# Altium PCB DRV8462.PcbDoc
Units mil, origin at the board's own origin, x right, y up, seen from the top; angles counter-clockwise.
Board outline 2200.64 x 1706.62 mil, 4 copper layers (Top Layer, GND, 3V3, Bottom Layer), stack 23.756 mil thick; 34 components, 27 nets, 125 pads, 186 vias.
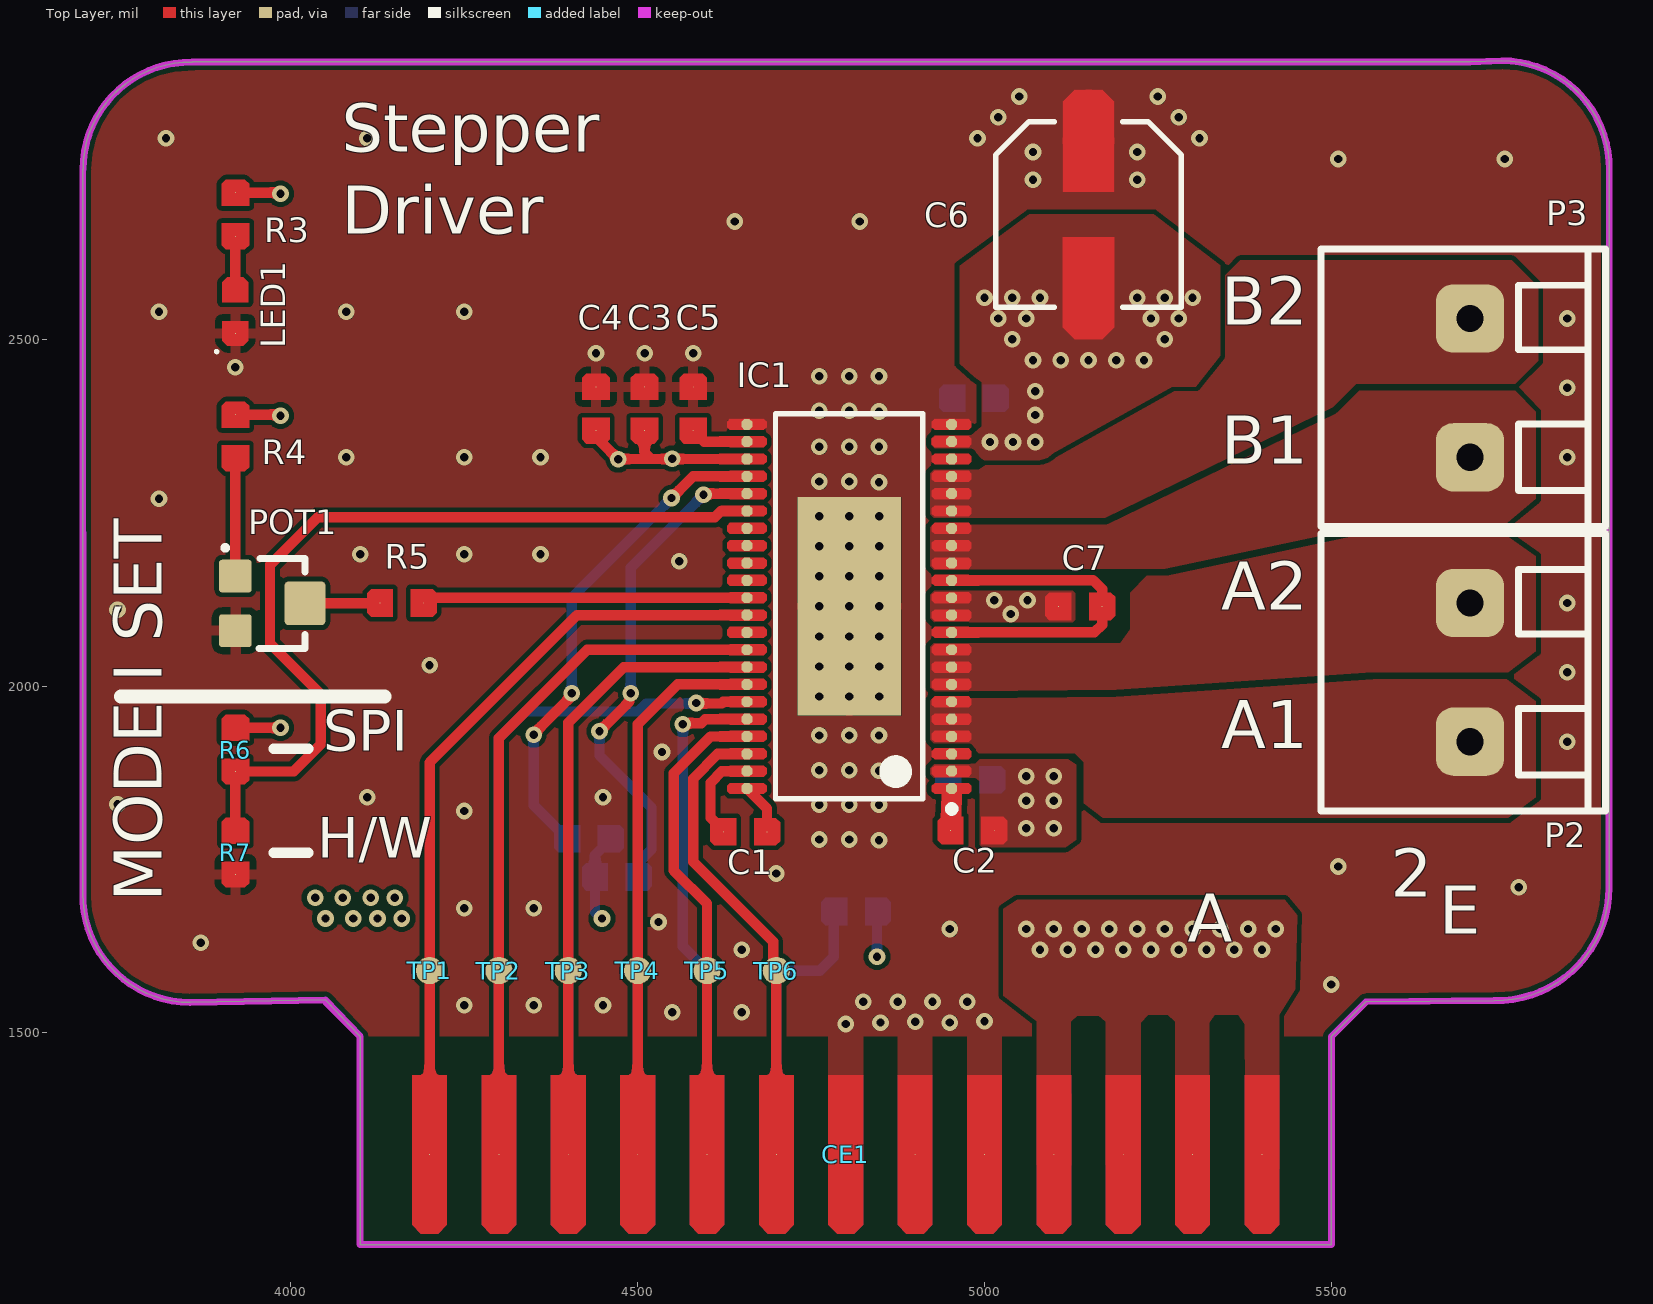
[diagram p0: Top Layer view]
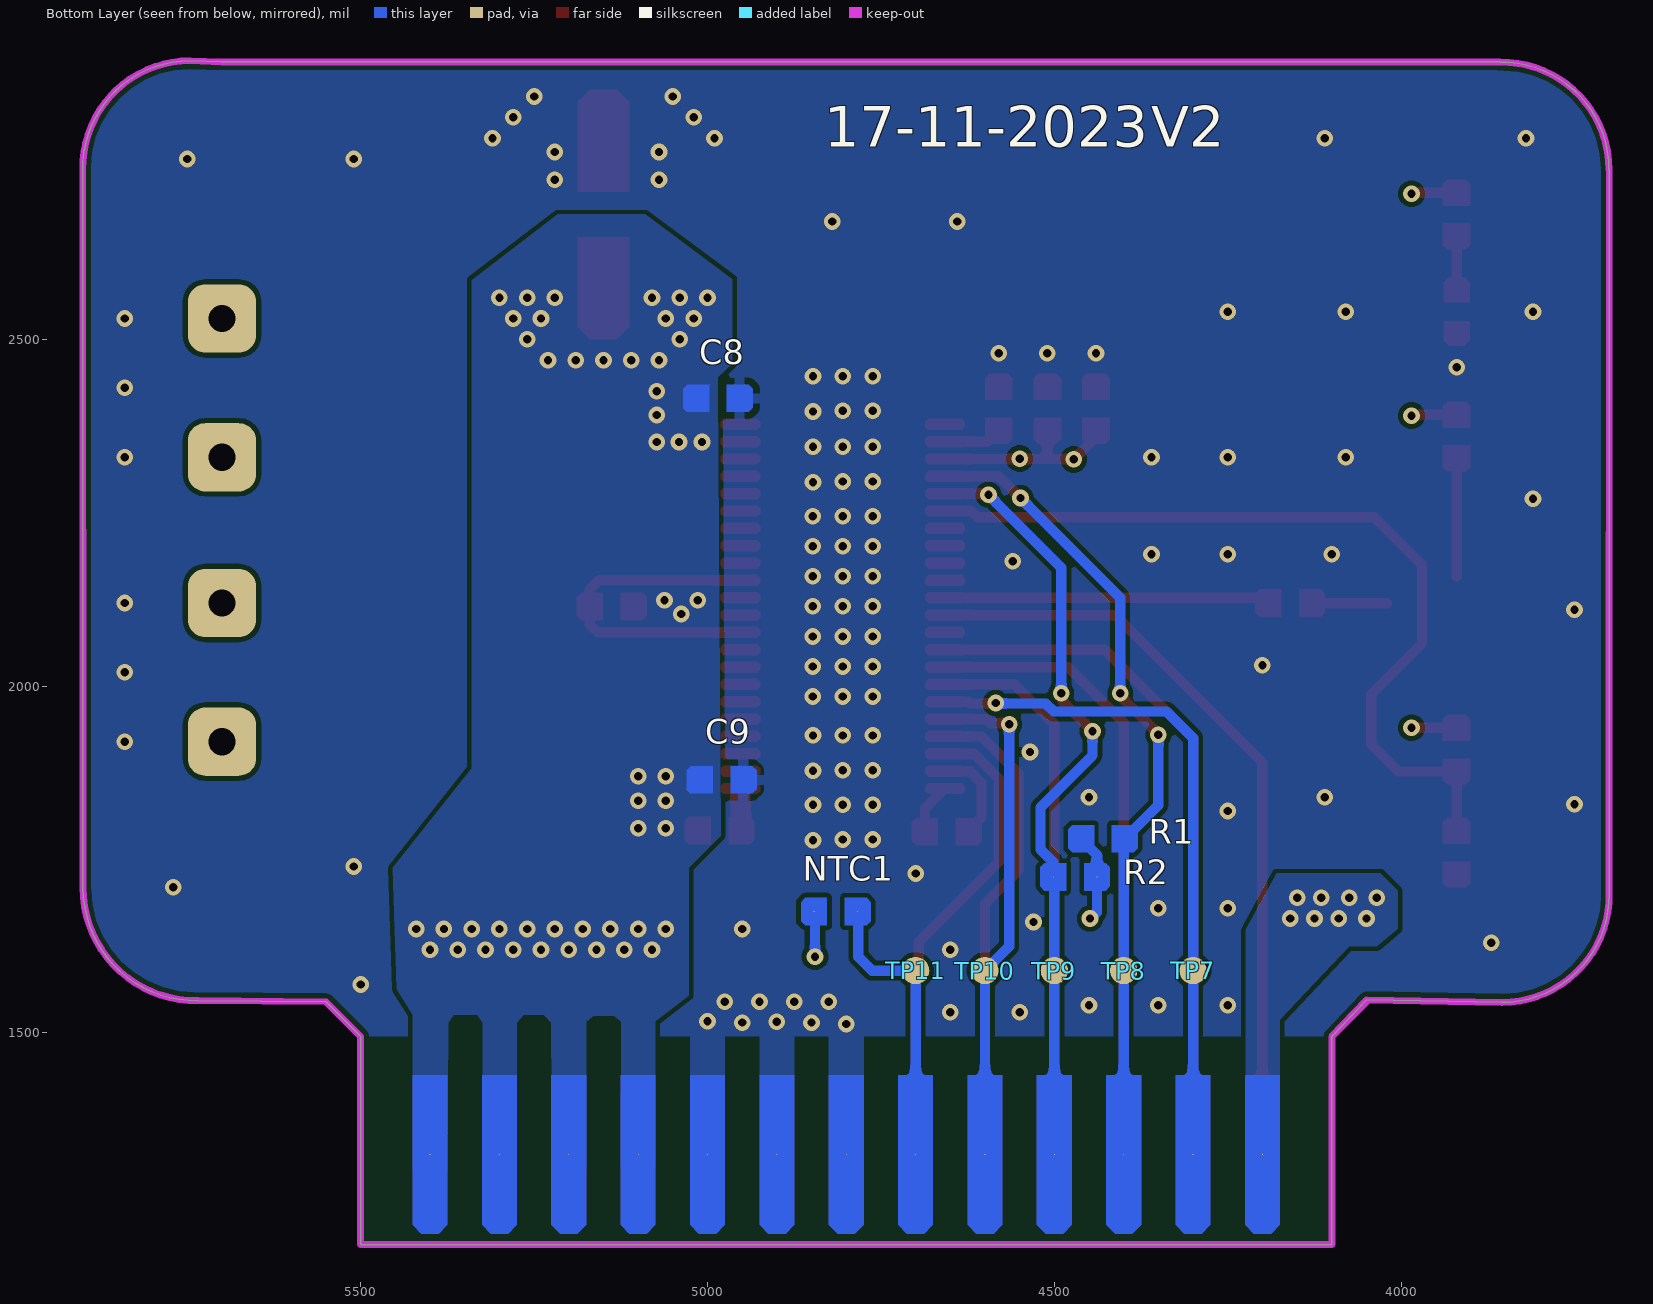
[diagram p1: Bottom Layer view, seen from below]
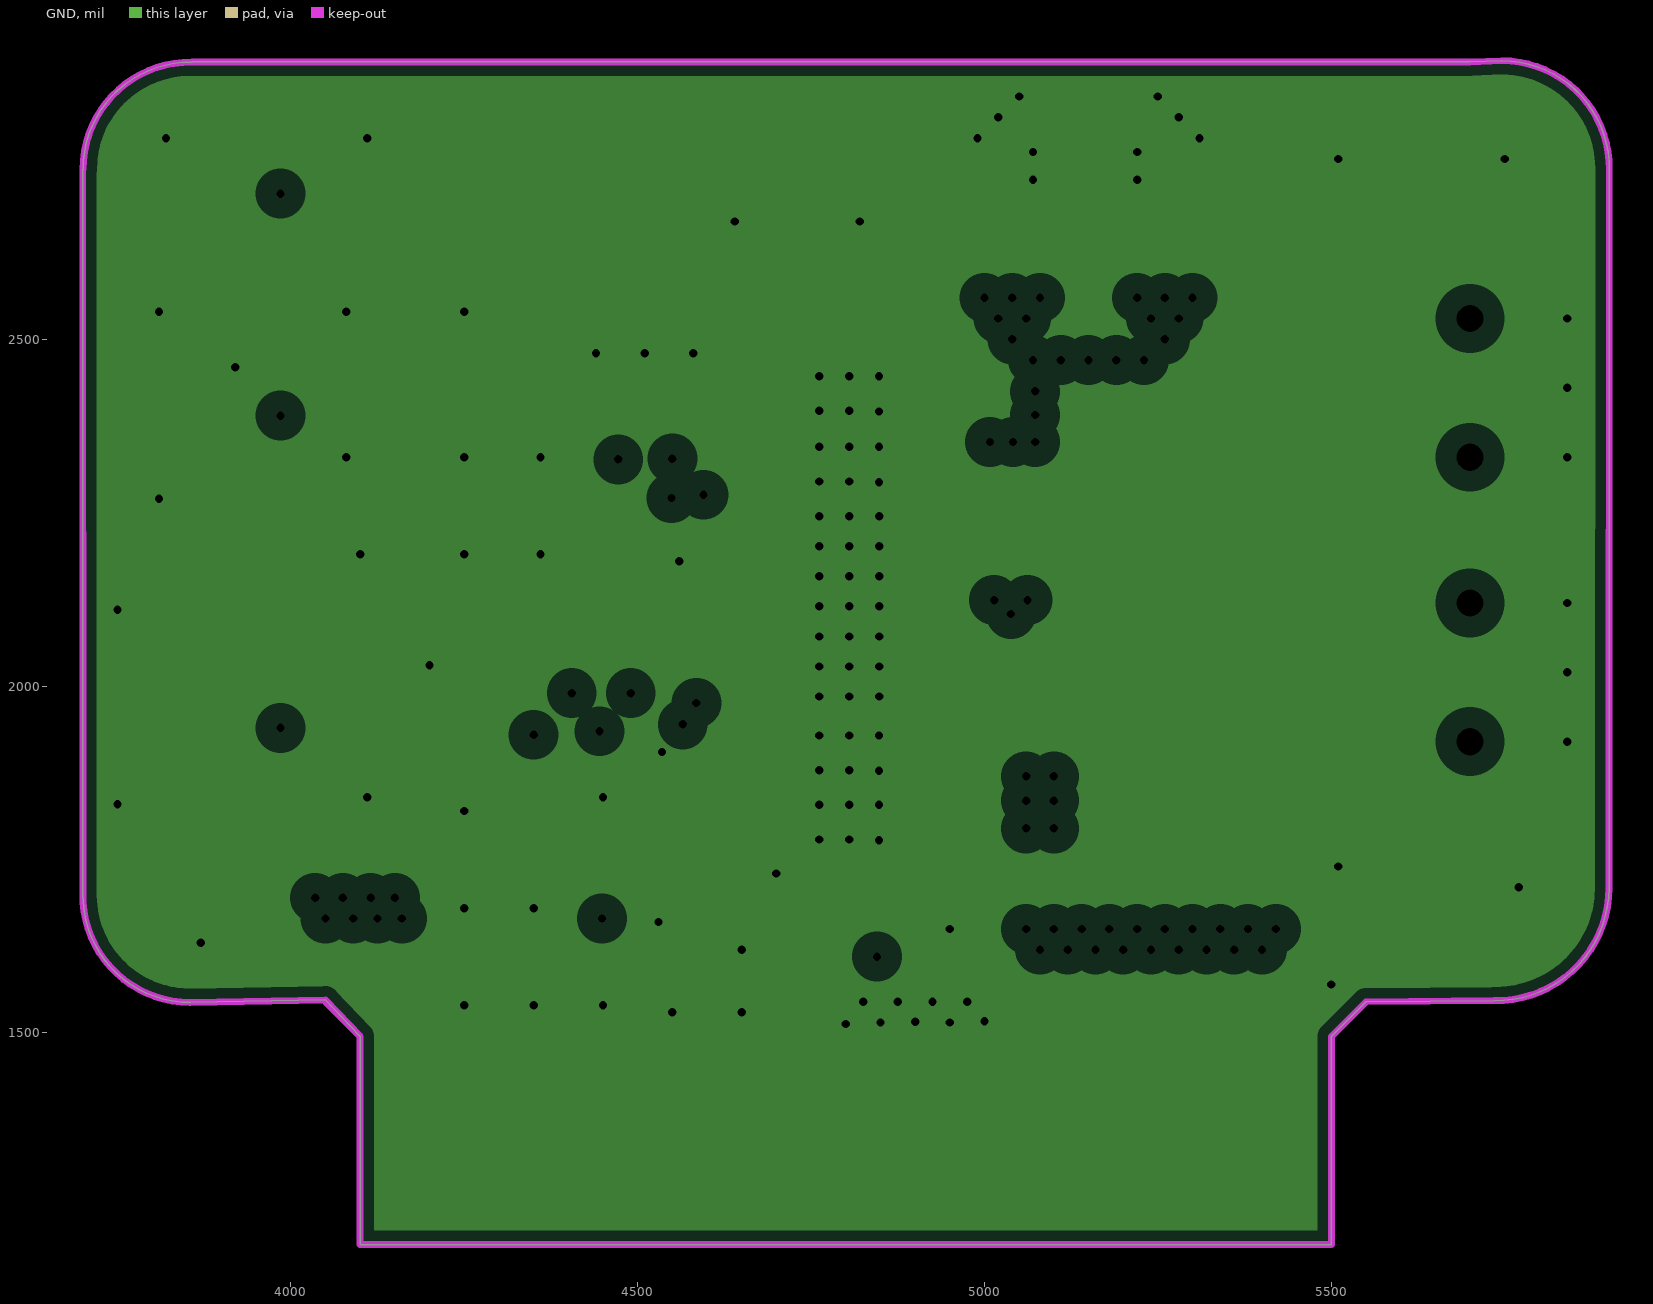
[diagram p2: GND, clearances drawn from the general rule]
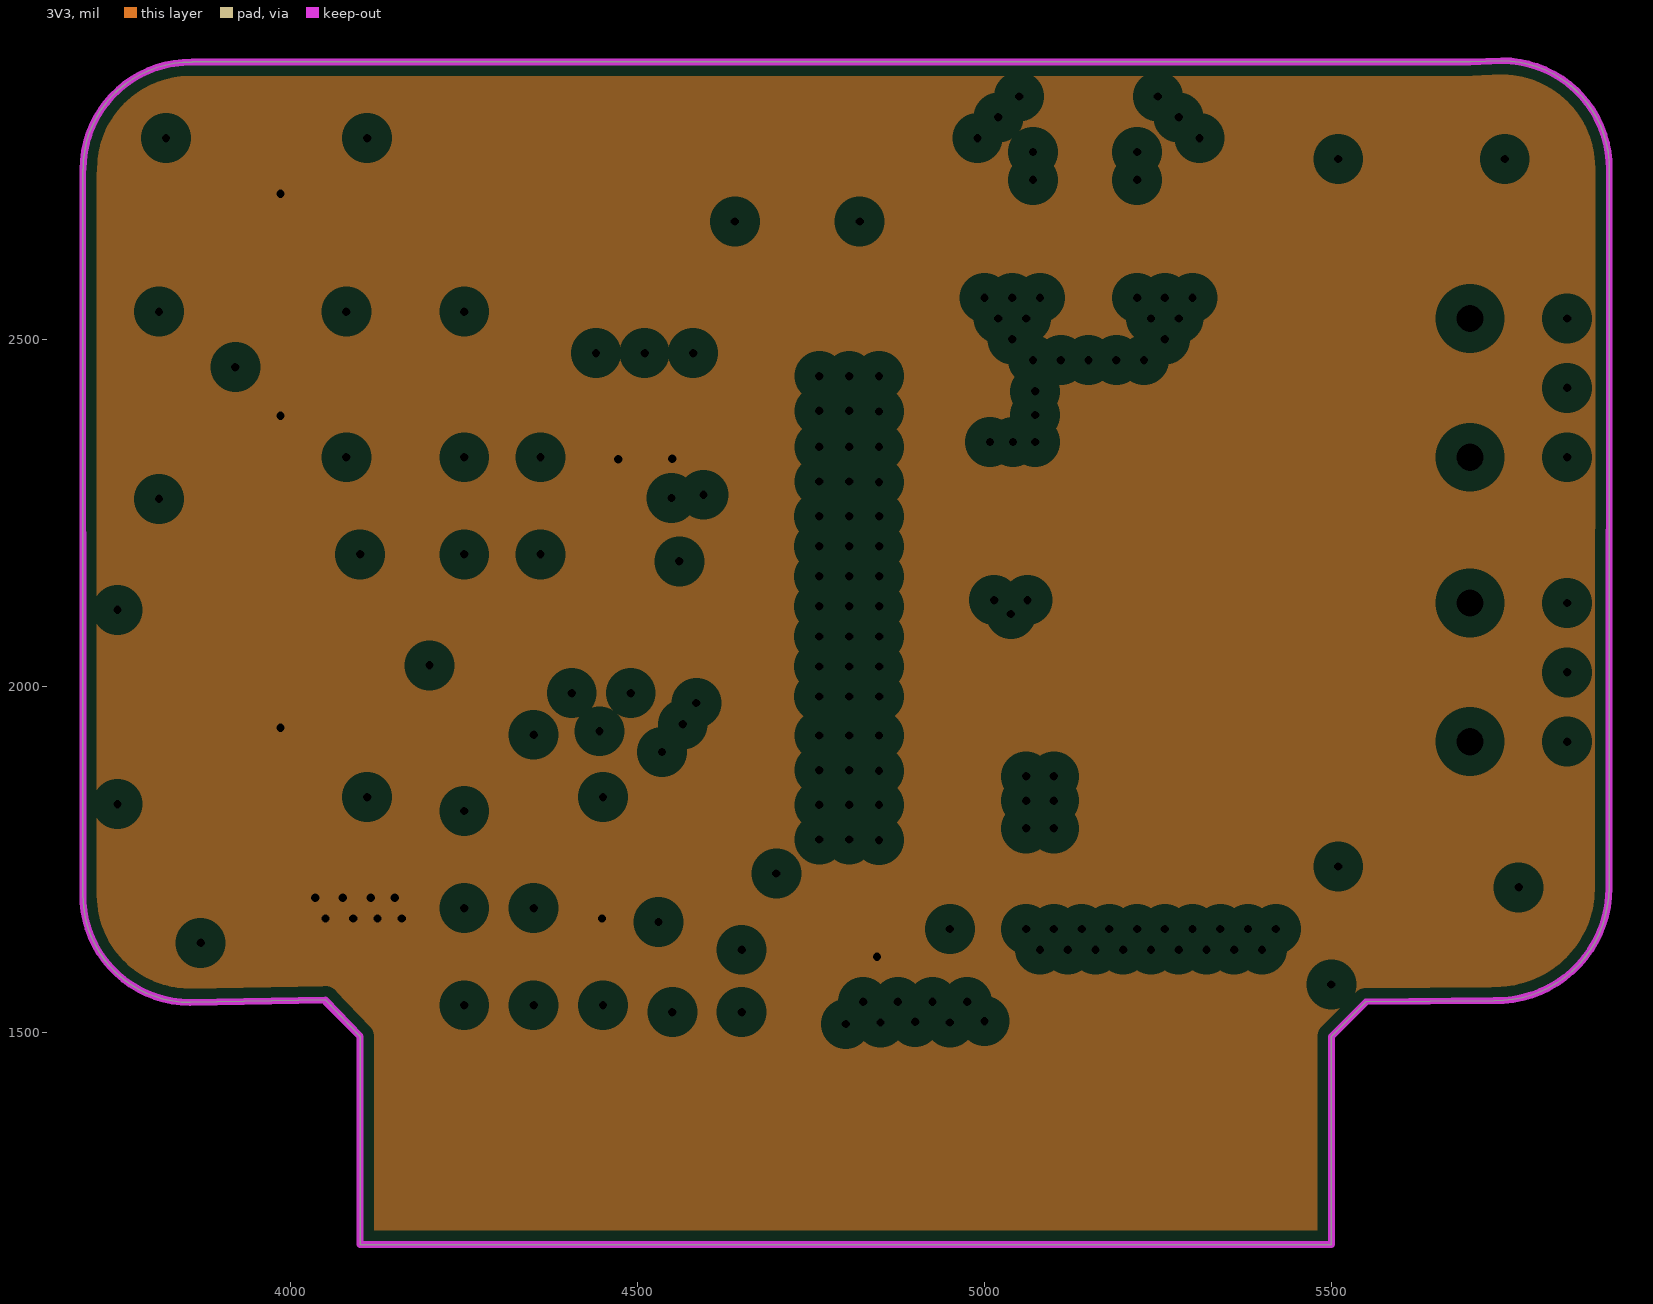
[diagram p3: 3V3, clearances drawn from the general rule]
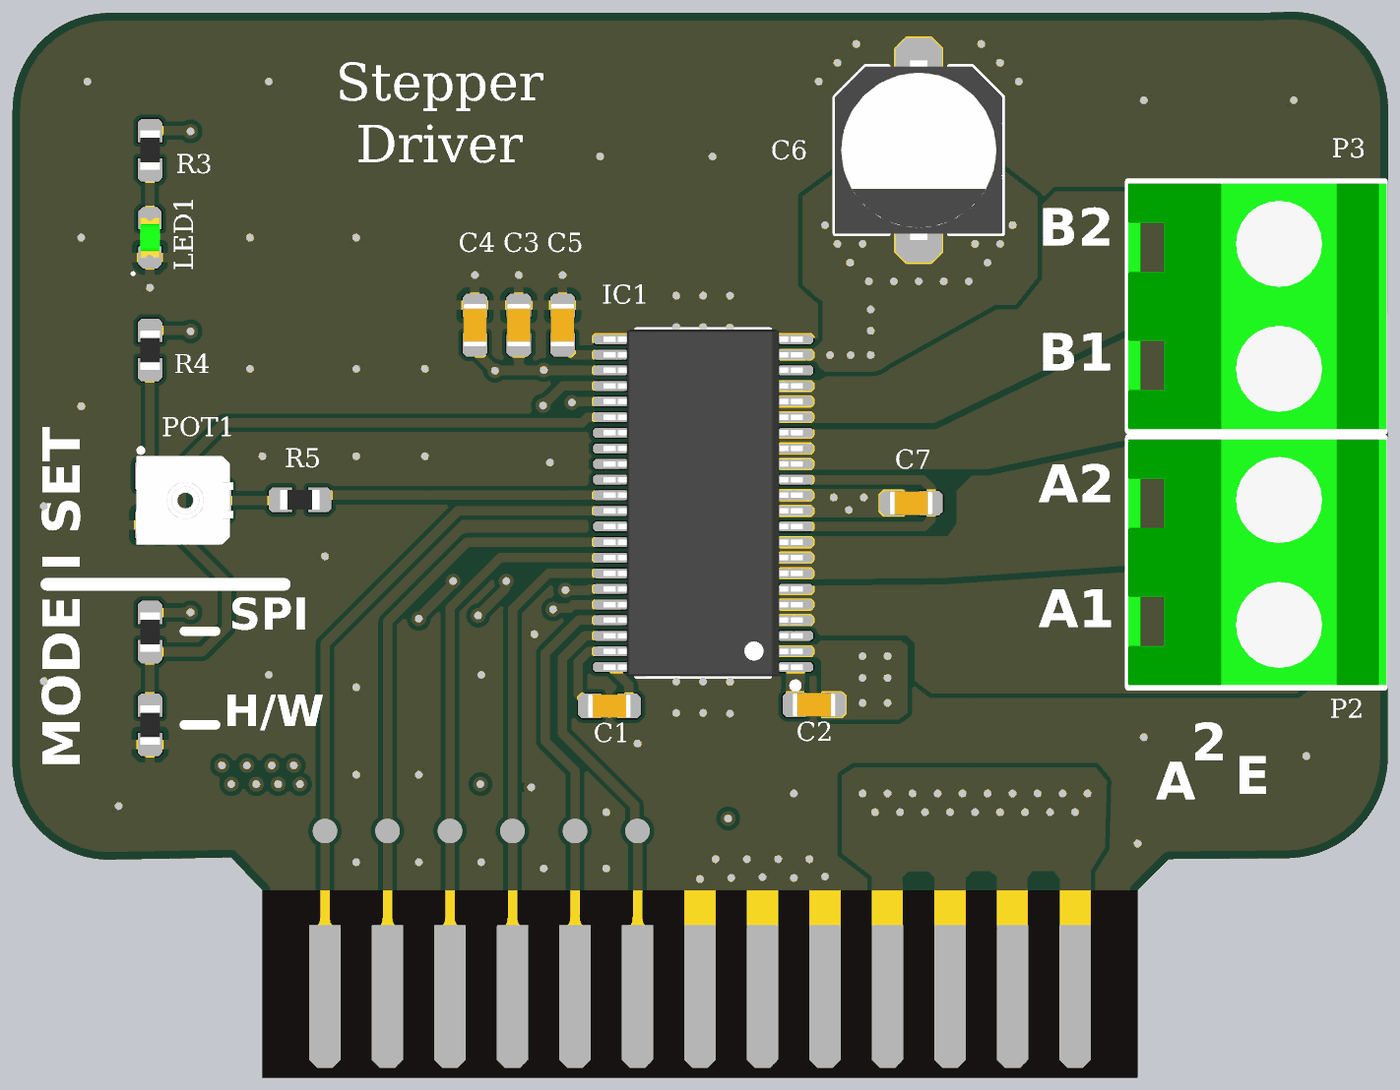
[diagram p4: 3D render of the assembled board from above, using the file's embedded part models]
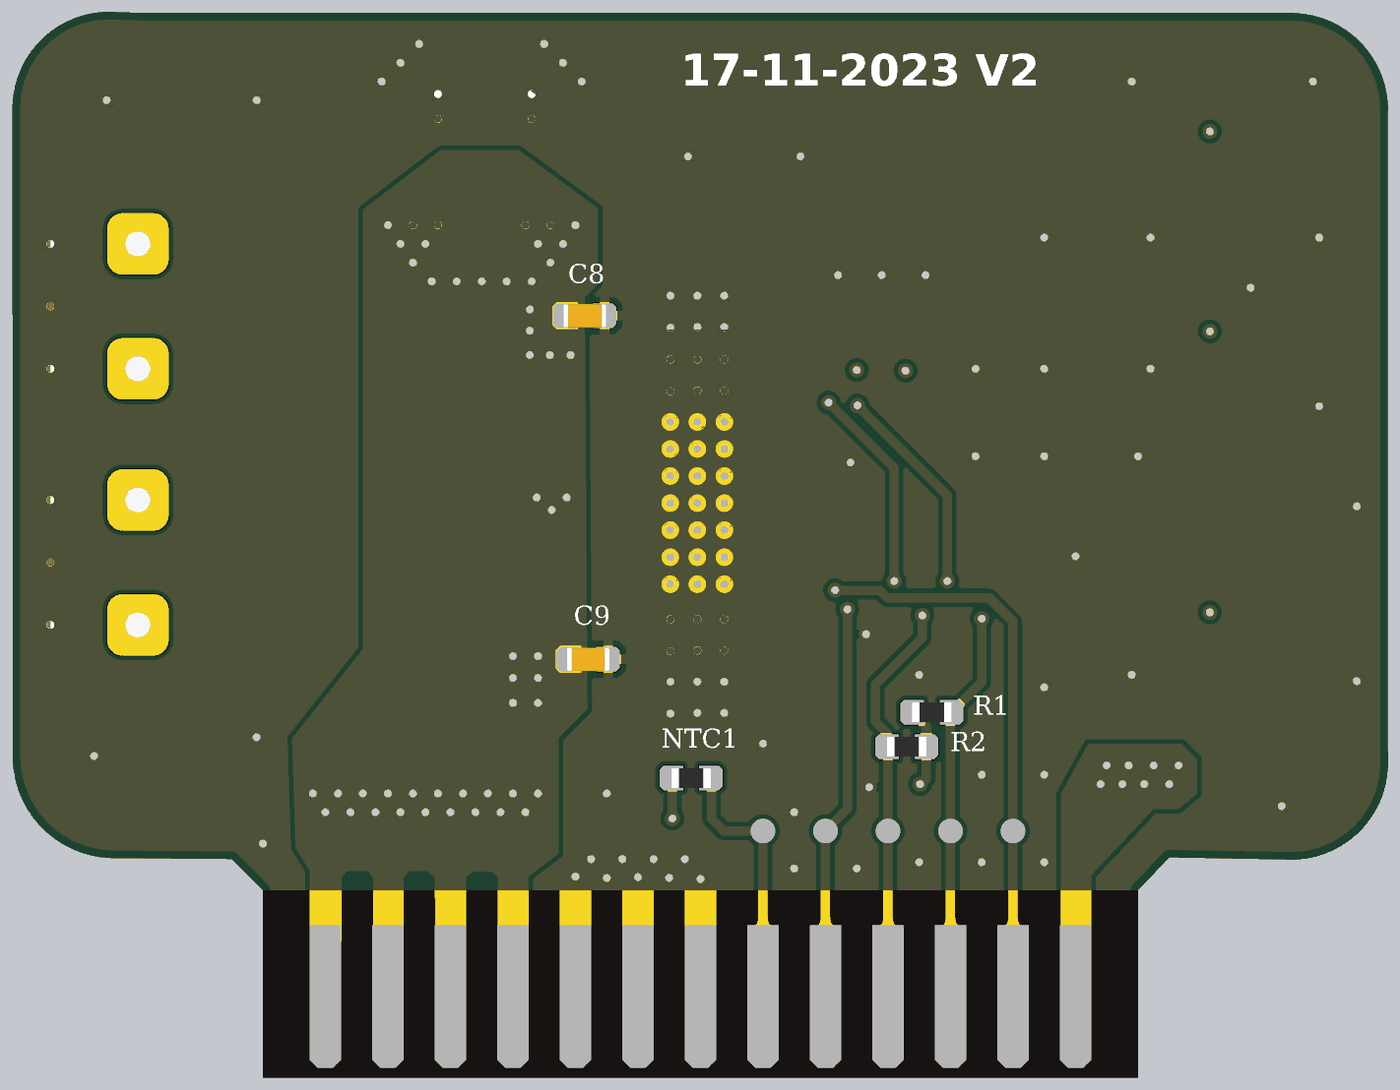
[diagram p5: 3D render of the assembled board from below, using the file's embedded part models]

## Layer stack, top to bottom
Top Solder: solder mask 0.4, Solder Resist, Dk 3.5
Top Layer: signal copper 1.4
Dielectric 2: prepreg 2.8, PP-006, Dk 4.1
GND: plane copper 1.378, net GND
Dielectric 1: dielectric 12.6, FR-4, Dk 4.8
3V3: plane copper 1.378, net VCC-3V3
Dielectric 3: prepreg 2.8, PP-006, Dk 4.1
Bottom Layer: signal copper 1.4
Bottom Solder: solder mask 0.4, Solder Resist, Dk 3.5

## Board outline
4100,1195 4100,1495 4049.95,1547.69 3854.62,1544.1 cw(c3854.62,1698.59) 3700.14,1701.1 3700.02,2745.02 3700.38,2745.02 cw(c3855.05,2745.02) 3857.56,2899.66 3857.56,2900 5300,2900 5700,2900 5746.02,2901.62 cw(c5746.02,2746.95) 5900.66,2744.44 5900.34,1709.39 cw(c5737.54,1709.39) 5734.89,1546.62 5550,1545 5500,1495 5500,1195

## Design rules (kind name [scope] priority, off if disabled: settings)
Clearance Clearance_1 [InNetClass('DRV_OUT') vs InNetClass('DRV_OUT')] p1: gap=15 ignorepadtopadclearanceinfootprint=TRUE except(7: Arc-Arc Arc-SMDPad Track-SMDPad SMDPad-SMDPad SMDPad-Poly; 10: Arc-Track Track-Track Track-Poly Poly-Poly)
Clearance [All] p2: gap=7 ignorepadtopadclearanceinfootprint=TRUE
MinimumSolderMaskSliver [All] p1: minsoldermaskwidth=4
PlaneClearance PlaneClearance_1 [InNetClass('SIG_1')] p1: clearance=20
PlaneClearance [All] p2: clearance=30
PlaneConnect [All] p1: planeconnectstyle=Direct reliefexpansion=20 reliefentries=4 reliefconductorwidth=10 reliefairgap=10
PolygonConnect PolygonConnect_3 [InNetClass('DRV_OUT')] p1: connectstyle=Direct reliefconductorwidth=10 reliefentries=4 polygonreliefangle="90 Angle" airgapwidth=10
PolygonConnect PolygonConnect_2 [InNet('VM')] p2: connectstyle=Direct reliefconductorwidth=10 reliefentries=4 polygonreliefangle="90 Angle" airgapwidth=10
PolygonConnect PolygonConnect_1 [InNet('VCC-3V3')] p3: connectstyle=Direct reliefconductorwidth=10 reliefentries=4 polygonreliefangle="90 Angle" airgapwidth=10
PolygonConnect [InComponentClass('RELIFE_CONNECT')] p4: connectstyle=Relief reliefconductorwidth=15 reliefentries=4 polygonreliefangle="90 Angle" airgapwidth=10
PolygonConnect PolygonConnect_4 [InComponentClass('DIRECT_GND_CONNECT') vs HasFootprint('CAPAE7366X60M')] p5: connectstyle=Direct reliefconductorwidth=10 reliefentries=4 polygonreliefangle="90 Angle" airgapwidth=10
RoutingVias [All] p1: holewidth=12 width=24 viastyle="Through Hole" minholewidth=12 minwidth=24 maxholewidth=12 maxwidth=24
SilkToSilkClearance [All] p1: silktosilkclearance=7
SilkToSolderMaskClearance [IsPad] p1: minsilkscreentomaskgap=7 clearancetoexposedcopper=TRUE
SolderMaskExpansion [All] p1: expansion=2 istentingtop=FALSE
UnRoutedNet [All] p1: checkbadconnections=TRUE
Width [All] p1: maxlimit=30 minlimit=15 preferedwidth=15
24 further rules are at their usual default settings.

## Classes and differential pairs
net class SIG_1: \F\A\U\L\T\ \H\O\M\E\ \S\C\S\ \S\L\E\E\P\
component class RELIFE_CONNECT: C1 C2 C3 C4 C5 C7 C8 C9 LED1 NTC1 P2 P3 POT1 R1 R2 R3 R4 R5 R6 R7 TP1 TP2 TP3 TP4 TP5 TP6 TP7 TP8 TP9 TP10 TP11
component class DIRECT_GND_CONNECT: C6 CE1 IC1
net class DRV_OUT: AOUT1 AOUT2 BOUT1 BOUT2

## Components (designator, comment, footprint, x,y, rotation, side; value= is the part's Value field where it differs from the comment)
C1 "0.1uf" CAP_0603 4655,1790 r0 top
C2 "1uf" CAP_0603 4982.5,1792 r0 top
C3 "1uf" CAP_0603 4510,2400 r90 top
C4 "0.1uf" CAP_0603 4440,2400 r270 top
C5 "1uf" CAP_0603 4580,2400 r270 top
C6 "100uf" CAPAE7366X60M 5150,2680 r270 top
C7 "10000pf" CAP_0603 5138,2115 r180 top
C8 "10000pf" CAP_0603 4985,2415 r0 bottom
C9 "10000pf" CAP_0603 4979.5,1865 r0 bottom
CE1 "Card edge connector" "Edge Connector" 4200,1325 r0 top
IC1 "DRV8462 Bipolar stepper driver" TSOP64P810X120_HS-45N 4805,2115 r180 top locked
LED1 "GREEN LED" DIOC1608X04N 3920,2540 r270 top
NTC1 "10K" SMD_0603 4815,1675 r0 bottom
P2 "Terminal Block" "TERM_BLOCK 5mm 2PIN" 5700,1920 r90 top
P3 "Terminal Block" "TERM_BLOCK 5mm 2PIN" 5700,2330 r90 top
POT1 "100K" TC33X-2_POT 4020.39,2119.37 r270 top
R1 "10Kohm" RES_0603 4430,1780 r0 bottom
R2 "10Kohm" RES_0603 4470,1725 r180 bottom
R3 "1Kohm" RES_0603 3920,2680 r90 top
R4 "10Kohm" RES_0603 3920,2360 r90 top
R5 "0 OHM Jump" RES_0603 4160,2120 r180 top
R6 "0 OHM Jump" RES_0603 3920,1908.5 r90 top
R7 "0 OHM Jump" RES_0603 3920,1760 r90 top
TP1 "Test point" TestPoint 4200,1590 r90 top
TP2 "Test point" TestPoint 4300,1590 r90 top
TP3 "Test point" TestPoint 4400,1590 r90 top
TP4 "Test point" TestPoint 4500,1590 r90 top
TP5 "Test point" TestPoint 4600,1590 r90 top
TP6 "Test point" TestPoint 4700,1590 r90 top
TP7 "Test point" TestPoint 4300,1590 r90 bottom
TP8 "Test point" TestPoint 4400,1590 r90 bottom
TP9 "Test point" TestPoint 4500,1590 r90 bottom
TP10 "Test point" TestPoint 4600,1590 r90 bottom
TP11 "Test point" TestPoint 4700,1590 r90 bottom

## Footprints (in the part's own frame and the unit in brackets; to place one, negate y for a bottom-side part, rotate by r counter-clockwise, add the part's x,y. Pads: shape width x height; smd on the part's side, far side on the other; paste and mask are expansions set on the pad)
CAP_0603 [mil] "Chip Capacitor, 2-Leads, Body 1.60x0.80mm, IPC Medium Density"
  round 1 smd: 1(-31.5,0) 2(31.5,0)
  Top Layer region: 12.8,-19.69 12.8,19.69 44.31,19.69 50.2,13.8 50.2,-13.8 44.31,-19.69
  Top Layer region: -50.2,-13.8 -50.2,13.8 -44.31,19.69 -12.8,19.69 -12.8,-19.69 -44.31,-19.69
  body extent -34,-19 34,19, height 31
CAPAE7366X60M [mil] "Aluminum Electrolytic Capacitor, Body 6.60x6.60x6.00mm, IPC Low Density"
  round 1 smd: 1(-106.3,0) 2(106.3,0)
  Top Layer region: -180.12,-19.88 -180.12,19.88 -162.6,37.4 -32.48,37.4 -32.48,-37.4 -162.6,-37.4
  Top Layer region: 32.48,-37.4 32.48,37.4 162.6,37.4 180.12,19.88 180.12,-19.88 162.6,-37.4
  silkscreen extent -134,-134 134,134, body extent -144,-134 144,134, height 236
DIOC1608X04N [mil] "Chip Diode, 2-Leads, Body 1.60x0.80mm, IPC Medium Density"
  round 1 smd: 1(-31.5,0) 2(31.5,0)
  Top Layer region: 13.78,-18.7 42.13,-18.7 49.21,-11.61 49.21,11.61 42.13,18.7 13.78,18.7
  Top Layer region: -49.21,-11.61 -42.13,-18.7 -13.78,-18.7 -13.78,18.7 -42.13,18.7 -49.21,11.61
  silkscreen extent 56,-29 60,-25, body extent -31,-16 31,16, height 31
"Edge Connector" [mil]
  round 1 smd: A1(0,0) A2(100,0) A3(200,0) A4(300,0) A5(400,0) A6(500,0) A7(600,0) A8(700,0) A9(800,0) A10(900,0) A11(1000,0) A12(1100,0) A13(1200,0)
  round 1 smd far side: B1(0,0) B2(100,0) B3(200,0) B4(300,0) B5(400,0) B6(500,0) B7(600,0) B8(700,0) B9(800,0) B10(900,0) B11(1000,0) B12(1100,0) B13(1200,0)
  Top Layer region: -25,-101.67 -12.5,-114.17 12.5,-114.17 25,-101.67 25,114.17 -25,114.17
  Top Layer region: 75,-101.67 87.5,-114.17 112.5,-114.17 125,-101.67 125,114.17 75,114.17
  Top Layer region: 175,-101.67 187.5,-114.17 212.5,-114.17 225,-101.67 225,114.17 175,114.17
  Top Layer region: 275,-101.67 287.5,-114.17 312.5,-114.17 325,-101.67 325,114.17 275,114.17
  Top Layer region: 375,-101.67 387.5,-114.17 412.5,-114.17 425,-101.67 425,114.17 375,114.17
  Top Layer region: 475,-101.67 487.5,-114.17 512.5,-114.17 525,-101.67 525,114.17 475,114.17
  Top Layer region: 575,-101.67 587.5,-114.17 612.5,-114.17 625,-101.67 625,114.17 575,114.17
  Top Layer region: 675,-101.67 687.5,-114.17 712.5,-114.17 725,-101.67 725,114.17 675,114.17
  Top Layer region: 775,-101.67 787.5,-114.17 812.5,-114.17 825,-101.67 825,114.17 775,114.17
  Top Layer region: 875,-101.67 887.5,-114.17 912.5,-114.17 925,-101.67 925,114.17 875,114.17
  Top Layer region: 975,-101.67 987.5,-114.17 1012.5,-114.17 1025,-101.67 1025,114.17 975,114.17
  Top Layer region: 1075,-101.67 1087.5,-114.17 1112.5,-114.17 1125,-101.67 1125,114.17 1075,114.17
  Top Layer region: 1175,-101.67 1187.5,-114.17 1212.5,-114.17 1225,-101.67 1225,114.17 1175,114.17
  Bottom Layer region: -25,-101.67 -12.5,-114.17 12.5,-114.17 25,-101.67 25,114.17 -25,114.17
  Bottom Layer region: 75,-101.67 87.5,-114.17 112.5,-114.17 125,-101.67 125,114.17 75,114.17
  Bottom Layer region: 175,-101.67 187.5,-114.17 212.5,-114.17 225,-101.67 225,114.17 175,114.17
  Bottom Layer region: 275,-101.67 287.5,-114.17 312.5,-114.17 325,-101.67 325,114.17 275,114.17
  Bottom Layer region: 375,-101.67 387.5,-114.17 412.5,-114.17 425,-101.67 425,114.17 375,114.17
  Bottom Layer region: 475,-101.67 487.5,-114.17 512.5,-114.17 525,-101.67 525,114.17 475,114.17
  Bottom Layer region: 575,-101.67 587.5,-114.17 612.5,-114.17 625,-101.67 625,114.17 575,114.17
  Bottom Layer region: 675,-101.67 687.5,-114.17 712.5,-114.17 725,-101.67 725,114.17 675,114.17
  Bottom Layer region: 775,-101.67 787.5,-114.17 812.5,-114.17 825,-101.67 825,114.17 775,114.17
  Bottom Layer region: 875,-101.67 887.5,-114.17 912.5,-114.17 925,-101.67 925,114.17 875,114.17
  Bottom Layer region: 975,-101.67 987.5,-114.17 1012.5,-114.17 1025,-101.67 1025,114.17 975,114.17
  Bottom Layer region: 1075,-101.67 1087.5,-114.17 1112.5,-114.17 1125,-101.67 1125,114.17 1075,114.17
  Bottom Layer region: 1175,-101.67 1187.5,-114.17 1212.5,-114.17 1225,-101.67 1225,114.17 1175,114.17
  Keep-Out Layer lines w10: -150,220 -100,170 -100,-130 1300,-130 1300,170 1350,220
RES_0603 [mil] "Chip Resistor, 2-Leads, Body 1.60x0.80mm, IPC Medium Density"
  round 1 smd: 1(-31.5,0) 2(31.5,0)
  Top Layer region: 12.8,-19.69 12.8,19.69 44.31,19.69 50.2,13.8 50.2,-13.8 44.31,-19.69
  Top Layer region: -50.2,-13.8 -50.2,13.8 -44.31,19.69 -12.8,19.69 -12.8,-19.69 -44.31,-19.69
  body extent -31,-16 31,16, height 18
SMD_0603 [mil]
  round 1 smd: 1(-31.5,0) 2(31.5,0)
  Top Layer region: -50.2,-13.8 -50.2,13.8 -44.31,19.69 -12.8,19.69 -12.8,-19.69 -44.31,-19.69
  Top Layer region: 12.8,-19.69 12.8,19.69 44.31,19.69 50.2,13.8 50.2,-13.8 44.31,-19.69
  body extent -31,-16 31,16, height 18
TC33X-2_POT [mm] "100K_potentiometer_SMD"
  rrect20% 1.2x1.2 smd: 1(-1,-2.55) 3(1,-2.55)
  rrect20% 1.6x1.5 smd: 2(0,0)
  silkscreen extent -2.08,-2.97 1.65,0, body extent -1.8,-3.12 1.8,0.84, height 1.13
"TERM_BLOCK 5mm 2PIN" [mm]
  rrect50% 2.5x2.5 hole 1: 1(0,0) 2(5.08,0)
  silkscreen extent -2.54,-4.95 7.62,5.46, body extent -2.46,-5.04 7.54,5.46, height 14
TestPoint [mm] "1mm"
  round 1 smd mask+0: 1(0,0)
TSOP64P810X120_HS-45N [mm] "TSOP, 44-Leads, Body 14.00x6.10mm, Pitch 0.64mm, Thermal Pad 8.00x3.80mm, IPC Medium Density"
  oct 0.4x0.4 smd mask+0.05: 1(-3.75,6.667) 2(-3.75,6.032) 3(-3.75,5.397) 4(-3.75,4.762) 5(-3.75,4.127) 6(-3.75,3.492) 7(-3.75,2.857) 8(-3.75,2.222) 9(-3.75,1.587) 10(-3.75,0.952) 11(-3.75,0.317) 12(-3.75,-0.318) 13(-3.75,-0.953) 14(-3.75,-1.588) 15(-3.75,-2.223) 16(-3.75,-2.858) 17(-3.75,-3.493) 18(-3.75,-4.128) 19(-3.75,-4.763) 20(-3.75,-5.398) 21(-3.75,-6.033) 22(-3.75,-6.667) 23(3.75,-6.667) 24(3.75,-6.032) 25(3.75,-5.397) 26(3.75,-4.762) 27(3.75,-4.127) 28(3.75,-3.492) 29(3.75,-2.857) 30(3.75,-2.222) 31(3.75,-1.587) 32(3.75,-0.952) 33(3.75,-0.317) 34(3.75,0.318) 35(3.75,0.953) 36(3.75,1.588) 37(3.75,2.223) 38(3.75,2.858) 39(3.75,3.493) 40(3.75,4.128) 41(3.75,4.763) 42(3.75,5.398) 43(3.75,6.033) 44(3.75,6.667)
  rect 3.8x8 smd: 45(0,0)
  Top Layer region: 3.025,-4.862 3.025,-4.663 3.125,-4.563 4.375,-4.563 4.475,-4.663 4.475,-4.862 4.375,-4.962 3.125,-4.962
  Top Layer region: 3.025,-4.227 3.025,-4.028 3.125,-3.928 4.375,-3.928 4.475,-4.028 4.475,-4.227 4.375,-4.327 3.125,-4.327
  Top Layer region: 3.025,-3.592 3.025,-3.393 3.125,-3.293 4.375,-3.293 4.475,-3.393 4.475,-3.592 4.375,-3.692 3.125,-3.692
  Top Layer region: 3.025,-2.957 3.025,-2.758 3.125,-2.658 4.375,-2.658 4.475,-2.758 4.475,-2.957 4.375,-3.057 3.125,-3.057
  Top Layer region: 3.025,-2.322 3.025,-2.123 3.125,-2.023 4.375,-2.023 4.475,-2.123 4.475,-2.322 4.375,-2.422 3.125,-2.422
  Top Layer region: 3.025,-1.687 3.025,-1.488 3.125,-1.388 4.375,-1.388 4.475,-1.488 4.475,-1.687 4.375,-1.787 3.125,-1.787
  Top Layer region: 3.025,-1.052 3.025,-0.853 3.125,-0.753 4.375,-0.753 4.475,-0.853 4.475,-1.052 4.375,-1.152 3.125,-1.152
  Top Layer region: 3.025,-0.417 3.025,-0.218 3.125,-0.118 4.375,-0.118 4.475,-0.218 4.475,-0.417 4.375,-0.517 3.125,-0.517
  Top Layer region: 3.025,0.218 3.025,0.417 3.125,0.517 4.375,0.517 4.475,0.417 4.475,0.218 4.375,0.118 3.125,0.118
  Top Layer region: 3.025,0.853 3.025,1.052 3.125,1.152 4.375,1.152 4.475,1.052 4.475,0.853 4.375,0.753 3.125,0.753
  Top Layer region: 3.025,1.488 3.025,1.687 3.125,1.787 4.375,1.787 4.475,1.687 4.475,1.488 4.375,1.388 3.125,1.388
  Top Layer region: 3.025,2.123 3.025,2.322 3.125,2.422 4.375,2.422 4.475,2.322 4.475,2.123 4.375,2.023 3.125,2.023
  Top Layer region: 3.025,2.758 3.025,2.957 3.125,3.057 4.375,3.057 4.475,2.957 4.475,2.758 4.375,2.658 3.125,2.658
  Top Layer region: 3.025,3.393 3.025,3.592 3.125,3.692 4.375,3.692 4.475,3.592 4.475,3.393 4.375,3.293 3.125,3.293
  Top Layer region: 3.025,4.028 3.025,4.227 3.125,4.327 4.375,4.327 4.475,4.227 4.475,4.028 4.375,3.928 3.125,3.928
  Top Layer region: 3.025,4.663 3.025,4.862 3.125,4.962 4.375,4.962 4.475,4.862 4.475,4.663 4.375,4.563 3.125,4.563
  Top Layer region: 3.025,5.298 3.025,5.497 3.125,5.597 4.375,5.597 4.475,5.497 4.475,5.298 4.375,5.198 3.125,5.198
  Top Layer region: 3.025,5.933 3.025,6.132 3.125,6.232 4.375,6.232 4.475,6.132 4.475,5.933 4.375,5.833 3.125,5.833
  Top Layer region: 3.025,6.568 3.025,6.767 3.125,6.867 4.375,6.867 4.475,6.767 4.475,6.568 4.375,6.468 3.125,6.468
  Top Layer region: -4.475,-6.767 -4.475,-6.568 -4.375,-6.468 -3.125,-6.468 -3.025,-6.568 -3.025,-6.767 -3.125,-6.867 -4.375,-6.867
  Top Layer region: -4.475,-6.132 -4.475,-5.933 -4.375,-5.833 -3.125,-5.833 -3.025,-5.933 -3.025,-6.132 -3.125,-6.232 -4.375,-6.232
  Top Layer region: -4.475,-5.497 -4.475,-5.298 -4.375,-5.198 -3.125,-5.198 -3.025,-5.298 -3.025,-5.497 -3.125,-5.597 -4.375,-5.597
  Top Layer region: -4.475,-4.862 -4.475,-4.663 -4.375,-4.563 -3.125,-4.563 -3.025,-4.663 -3.025,-4.862 -3.125,-4.962 -4.375,-4.962
  Top Layer region: -4.475,-4.227 -4.475,-4.028 -4.375,-3.928 -3.125,-3.928 -3.025,-4.028 -3.025,-4.227 -3.125,-4.327 -4.375,-4.327
  Top Layer region: -4.475,-3.592 -4.475,-3.393 -4.375,-3.293 -3.125,-3.293 -3.025,-3.393 -3.025,-3.592 -3.125,-3.692 -4.375,-3.692
  Top Layer region: -4.475,-2.957 -4.475,-2.758 -4.375,-2.658 -3.125,-2.658 -3.025,-2.758 -3.025,-2.957 -3.125,-3.057 -4.375,-3.057
  Top Layer region: -4.475,-2.322 -4.475,-2.123 -4.375,-2.023 -3.125,-2.023 -3.025,-2.123 -3.025,-2.322 -3.125,-2.422 -4.375,-2.422
  Top Layer region: -4.475,-1.687 -4.475,-1.488 -4.375,-1.388 -3.125,-1.388 -3.025,-1.488 -3.025,-1.687 -3.125,-1.787 -4.375,-1.787
  Top Layer region: -4.475,-1.052 -4.475,-0.853 -4.375,-0.753 -3.125,-0.753 -3.025,-0.853 -3.025,-1.052 -3.125,-1.152 -4.375,-1.152
  Top Layer region: -4.475,-0.417 -4.475,-0.218 -4.375,-0.118 -3.125,-0.118 -3.025,-0.218 -3.025,-0.417 -3.125,-0.517 -4.375,-0.517
  Top Layer region: -4.475,0.218 -4.475,0.417 -4.375,0.517 -3.125,0.517 -3.025,0.417 -3.025,0.218 -3.125,0.118 -4.375,0.118
  Top Layer region: -4.475,0.853 -4.475,1.052 -4.375,1.152 -3.125,1.152 -3.025,1.052 -3.025,0.853 -3.125,0.753 -4.375,0.753
  Top Layer region: -4.475,1.488 -4.475,1.687 -4.375,1.787 -3.125,1.787 -3.025,1.687 -3.025,1.488 -3.125,1.388 -4.375,1.388
  Top Layer region: -4.475,2.123 -4.475,2.322 -4.375,2.422 -3.125,2.422 -3.025,2.322 -3.025,2.123 -3.125,2.023 -4.375,2.023
  Top Layer region: -4.475,2.758 -4.475,2.957 -4.375,3.057 -3.125,3.057 -3.025,2.957 -3.025,2.758 -3.125,2.658 -4.375,2.658
  Top Layer region: -4.475,3.393 -4.475,3.592 -4.375,3.692 -3.125,3.692 -3.025,3.592 -3.025,3.393 -3.125,3.293 -4.375,3.293
  Top Layer region: -4.475,4.028 -4.475,4.227 -4.375,4.327 -3.125,4.327 -3.025,4.227 -3.025,4.028 -3.125,3.928 -4.375,3.928
  Top Layer region: -4.475,4.663 -4.475,4.862 -4.375,4.962 -3.125,4.962 -3.025,4.862 -3.025,4.663 -3.125,4.563 -4.375,4.563
  Top Layer region: -4.475,5.298 -4.475,5.497 -4.375,5.597 -3.125,5.597 -3.025,5.497 -3.025,5.298 -3.125,5.198 -4.375,5.198
  Top Layer region: -4.475,5.933 -4.475,6.132 -4.375,6.232 -3.125,6.232 -3.025,6.132 -3.025,5.933 -3.125,5.833 -4.375,5.833
  Top Layer region: -4.475,6.568 -4.475,6.767 -4.375,6.867 -3.125,6.867 -3.025,6.767 -3.025,6.568 -3.125,6.468 -4.375,6.468
  Top Layer region: 3.025,-6.767 3.025,-6.568 3.125,-6.468 4.375,-6.468 4.475,-6.568 4.475,-6.767 4.375,-6.867 3.125,-6.867
  Top Layer region: 3.025,-6.132 3.025,-5.933 3.125,-5.833 4.375,-5.833 4.475,-5.933 4.475,-6.132 4.375,-6.232 3.125,-6.232
  Top Layer region: 3.025,-5.497 3.025,-5.298 3.125,-5.198 4.375,-5.198 4.475,-5.298 4.475,-5.497 4.375,-5.597 3.125,-5.597
  silkscreen extent -3.88,-7.05 2.7,7.54, body extent -4.05,-7.05 4.05,7.05, height 1.2

## Part data
C1 C4: library part 0000012, "CAP CER 0.1uF 10V X7R 0603", Digikey Part Number=732-7939-2-ND, capaticanse=0.1uf, ComponentLink1Description=digikey, ComponentLink1URL=https://www.digikey.com/en/products/detail/w%C3%BCrth-elektronik/885012206020/5453794
C2 C5: library part 0000009, "CAP CER 1uF 0603 16V X7R", Digikey Part Number=1276-1019-2-ND, capaticanse=1uf, ComponentLink1Description=digikey, ComponentLink1URL=https://www.digikey.com/en/products/detail/samsung-electro-mechanics/CL10B105KO8NNNC/3886677
C3: library part 0000011, "CAP CER 1uF 10V X7R 0603", Digikey Part Number=1276-1946-2-ND, capaticanse=1uf, ComponentLink1Description=digikey, ComponentLink1URL=https://www.digikey.com/en/products/detail/samsung-electro-mechanics/CL10B105KP8NNNC/3887604
C6: library part 0000013, "CAP ALUM POLY 100UF 20% 63V SMD", Digikey Part Number=399-15648-2-ND, capaticanse=100uf, ComponentLink1Description=digikey, ComponentLink1URL=https://www.digikey.com/en/products/detail/kemet/A767MU107M1JLAE028/7392906
C7 C8 C9: library part 0000010, "CAP CER 10000PF 63V X7R 0603", Digikey Part Number=1608-1294-2-ND, capaticanse=10000pf, ComponentLink1Description=digikey, ComponentLink1URL=https://www.digikey.com/en/products/detail/knowles-syfer/060330630103KXT/6565244
CE1: library part 00000007, "Card edge connector 26 PINs"
IC1: library part DRV8462, "65-V, 10-A, DUAL H-BRIDGE STEPPER DRIVER", Digikey Part Number=296-DRV8462DDWRTR-ND, MOUSER Part Number=595-DRV8462DDWR, ComponentLink1Description=DigiKey, ComponentLink1URL=https://www.digikey.com/en/products/detail/texas-instruments/DRV8462DDWR/17395001?s=N4IgTCBcDaICYCcBuAOALANggXQL5A, ComponentLink2Description=Mouser, ComponentLink2URL=https://eu.mouser.com/ProductDetail/Texas-Instruments/DRV8462DDWR?qs=rQFj71Wb1eVexvYNsDfnvA%3D%3D, ComponentLink3Description=datasheet, ComponentLink3URL=https://www.ti.com/lit/ds/symlink/drv8462.pdf
LED1: library part 00000001, "LED GREEN DIFFUSED 0603 SMD", Supplier Part Number 1=Q65111A3964, ComponentLink1Description=Digikey, ComponentLink1URL=https://www.digikey.com/en/products/detail/ams-osram-usa-inc/LG-Q396-PS-35/5249855, Supplier 1=Avnet
NTC1: library part 00000003, "THERMISTOR NTC 10KOHM 3380K 0603", Supplier Part Number 1=NCP18XH103F03RB, ComponentLink1Description=Digikey, ComponentLink1URL=https://www.digikey.com/en/products/detail/murata-electronics/NCU18XH103F6SRB/7243451, Supplier 1="Arrow Electronics"
P2 P3: library part 00000001, "Terminal block 90 deg 5mm 2PIN", Digikey Part Number=2057-EB20-02-C-ND, ComponentLink1Description=DigiKey, ComponentLink1URL=https://www.digikey.com/en/products/detail/adam-tech/EB20-02-C/9831508
POT1: library part 00000002, "TRIMMER 100K OHM 0.1W J LEAD TOP", Supplier Part Number 1=TC33X-2-104E, ComponentLink1Description=DigiKey, ComponentLink1URL=https://www.digikey.com/en/products/detail/bourns-inc/TC33X-2-104E/612859, Supplier 1="Arrow Electronics"
R1 R2 R4: library part R000001, "RES 10K OHM 1% 1/10W 0603", ComponentLink1Description=digikey, ComponentLink1URL=https://www.digikey.com/en/products/detail/vishay-beyschlag-draloric-bc-components/MCT06030C1002FP500/1850440, resistance=10Kohm
R3: library part R000004, "RES 1K OHM 1% 1/10W 0603", ComponentLink1Description=digikey, ComponentLink1URL=https://www.digikey.com/en/products/detail/vishay-beyschlag-draloric-bc-components/MCT06030C1001FP500/2607821, resistance=1Kohm
R5 R6 R7: library part R000007, "RES 0 OHM JUMPER 1/10W 0603", Supplier Part Number 1=RMCF0603ZT0R00, ComponentLink1Description=DigiKey, ComponentLink1URL=https://www.digikey.com/en/products/detail/stackpole-electronics-inc/RMCF0603ZT0R00/1756908, resistance="0 OHM Jump", Supplier 1="Arrow Electronics"
TP1 TP2 TP3 TP4 TP5 TP6 TP7 TP8 TP9 TP10 TP11: library part TP002, "Test point 1mm"

## Via types
v1: diameter 24, hole 12, Top Layer to Bottom Layer, 186 vias

## Nets (pads, with @x,y where several pads share a name; then routed paths per layer and width w, separated by ;. In a path a pad name is that pad's centre, name@x,y a point inside that pad or via, vN(x,y) a via of type N, cw(c..) or ccw(c..) an arc to the next point about the centre after c; other vN are vias at no path point)
\F\A\U\L\T\: CE1.B3 IC1.26 R1.1 TP8.1 | length 1170.8
  Top Layer w15: v1(4350,1930) 4350,1931.11 4405,1986.11 v1(4405,1990) ; v1(4548.76,2271.24) 4580.02,2302.5 IC1.26
  Bottom Layer w15: v1(4350,1930) 4350,1828.5 R1.1 4400,1778.5 TP8.1 CE1.B3 ; v1(4405,1990) 4405,2127.48 v1(4548.76,2271.24)
\H\O\M\E\: CE1.B4 IC1.27 R2.1 TP9.1 | length 1115.5
  Top Layer w15: v1(4445,1935) 4488.28,1978.28 4488.28,1988.28 v1(4490,1990) ; v1(4595,2276) 4596.5,2277.5 IC1.27
  Bottom Layer w15: v1(4445,1935) 4445,1900 4520,1825 4520,1765 4501.5,1746.5 R2.1 4500,1723.5 TP9.1 CE1.B4 ; v1(4490,1990) 4490,2171 v1(4595,2276)
\S\C\S\: CE1.A1 IC1.34 TP1.1 | length 1110.4
  Top Layer w15: CE1.A1 TP1.1 4200,1890 4412.5,2102.5 IC1.34
\S\L\E\E\P\: CE1.A6 IC1.42 TP6.1 | length 683.6
  Top Layer w15: IC1.42 4615.72,1902.5 4580,1866.78 4580,1746.59 4695.34,1631.26 4695.34,1594.66 TP6.1 CE1.A6
AOUT1: IC1.4 IC1.5 IC1.6 P2.1
AOUT2: IC1.7 IC1.8 IC1.9 P2.2
BOUT1: IC1.14 IC1.15 IC1.16 P3.1
BOUT2: IC1.17 IC1.18 IC1.19 P3.2
CPH: C1.2 IC1.44 | length 74.6
  Top Layer w15: IC1.44 4686.5,1823.37 C1.2
CPL: C1.1 IC1.43 | length 137.7
  Top Layer w15: C1.1 4623.5,1791.5 4605,1810 4605,1860.67 4621.4,1877.07 4627.16,1877.07 4627.59,1877.5 IC1.43
DIR: CE1.B5 IC1.40 TP10.1 | length 730
  Top Layer w15: v1(4565,1945) 4566.72,1946.72 4591.72,1946.72 4597.5,1952.5 IC1.40
  Bottom Layer w15: v1(4565,1945) 4565,1625 TP10.1 CE1.B5
DVDD: C5.2 IC1.24 | length 84
  Top Layer w15: C5.2 4596,2352.5 IC1.24
ENABLE: CE1.A5 IC1.41 TP5.1 | length 696.4
  Top Layer w15: CE1.A5 TP5.1 4600,1686.44 4552.19,1734.25 4552.19,1874.36 4605.33,1927.5 IC1.41
GND: C3.2 C4.1 C5.1 C6.1 C7.1 C8.1 C9.1 CE1.A7 CE1.A8 CE1.A9 CE1.B7 CE1.B8 CE1.B9 IC1.3 IC1.10 IC1.13 IC1.20 IC1.22 IC1.23 IC1.45 LED1.2 POT1.3 R7.1 | length 494.7
  Top Layer w15: IC1.10 5158.5,2077.5 5169.5,2088.5 C7.1 5169.5,2139.5 5156.5,2152.5 IC1.13
  other v1: 4800,1513 4850,1515 4950,1515 4900,1516 5000,1517 4550,1530 4650,1530 4250,1540 4350,1540 4450,1540 4825,1545 4875,1545 4925,1545 4975,1545 5500,1570 4650,1620 3870,1630 4950,1650 4530,1660 4250,1680 4350,1680 5770,1710 4700,1730 5510,1740 4848,1778 4762,1779 4805,1779 4250,1820 4762,1829 4805,1829 4848,1829 3750,1830 4110,1840 4450,1840 4848,1878 4762,1879 4805,1879 4535,1905 5840,1920 4762,1929 4805,1929 4848,1929 4761.69,1985.08 4805,1985.08 4848.31,1985.08 5840,2020 4761.69,2028.39 4805,2028.39 4848.31,2028.39 4200,2030 4761.69,2071.69 4805,2071.69 4848.31,2071.69 3750,2110 4761.69,2115 4805,2115 4848.31,2115 5840,2120 4761.69,2158.31 4805,2158.31 4848.31,2158.31 4560,2180 4100,2190 4250,2190 4360,2190 4761.69,2201.61 4805,2201.61 4848.31,2201.61 4761.69,2244.92 4805,2244.92 4848.31,2244.92 3810,2270 4848,2294 4762,2295 4805,2295 4080,2330 4250,2330 4360,2330 5840,2330 4762,2345 4805,2345 4848,2345 4848,2396 4762,2397 4805,2397 5840,2430 4762,2447 4805,2447 4848,2447 3920,2460 4440,2480 4510,2480 4580,2480 5840,2530 3810,2540 4080,2540 4250,2540 4640,2670 4820,2670 5070,2730 5220,2730 5510,2760 5750,2760 5070,2770 5220,2770 3820,2790 4110,2790 4990,2790 5310,2790 5020,2820 5280,2820 5050,2850 5250,2850
MODE: IC1.28 R6.1 R7.2 | length 1233.4
  Top Layer w15: R7.2 R6.1 4004.01,1877.01 4043,1916 4043,1988 3970,2061 3970,2175 4038.5,2243.5 4610.98,2243.5 4619.98,2252.5 IC1.28
NetLED1_1: LED1.1 R3.1 | length 77
  Top Layer w15: LED1.1 R3.1
NetPOT1_1: POT1.1 R4.1 | length 169.8
  Top Layer w15: POT1.1 R4.1
NetPOT1_2: POT1.2 R5.2 | length 108.4
  Top Layer w15: POT1.2 4127.87,2119.37 R5.2
NTC: CE1.B6 NTC1.1 TP11.1 | length 421.2
  Bottom Layer w15: CE1.B6 TP11.1 4762.56,1590 4782.56,1610 4782.56,1674.06 NTC1.1
SCLK: CE1.A4 IC1.38 TP4.1 | length 801.2
  Top Layer w15: CE1.A4 TP4.1 4500,1945 4557.5,2002.5 IC1.38
SDI: CE1.A3 IC1.37 TP3.1 | length 913
  Top Layer w15: CE1.A3 TP3.1 4400,1947.52 4479.98,2027.5 IC1.37
SDO: CE1.A2 IC1.36 TP2.1 | length 1010.2
  Top Layer w15: CE1.A2 TP2.1 4300,1925 4427.5,2052.5 IC1.36
STEP: CE1.B2 IC1.39 TP7.1 | length 979.7
  Top Layer w15: v1(4584.63,1975.67) 4585.3,1975 4621.15,1975 4623.65,1977.5 IC1.39
  Bottom Layer w15: CE1.B2 TP7.1 4300,1925 4338.5,1963.5 4500.98,1963.5 4512.48,1975 4583.97,1975 v1(4584.63,1975.67)
VCC-3V3: C3.1 C4.2 CE1.B1 IC1.25 NTC1.2 R1.2 R2.2 R3.2 R4.2 R6.2 | length 679.8
  Top Layer w15: R6.2 v1(3985,1940) ; R4.2 3983.5,2391.5 v1(3985,2390) ; R3.2 3983.5,2711.5 v1(3985,2710) ; C4.2 4440,2359 v1(4472,2327) 4472.5,2327.5 4518.79,2327.5 ; C3.1 4510,2336.29 4518.79,2327.5 ; IC1.25 4550,2327.5 4518.79,2327.5 ; v1(4845,1610) v1@4846.5,1611.5
  Bottom Layer w15: v1@4450,1665 4447.29,1665 4438.5,1673.79 R2.2 4438.5,1757.01 R1.2 ; v1(4845,1610) 4845,1673.5 NTC1.2
  other v1: 4050,1665 4090,1665 4125,1665 4160,1665 4448.65,1665 4035,1695 4075,1695 4115,1695 4150,1695 4550,2328
VCP: C2.1 IC1.1 | length 50.2
  Top Layer w30: C2.1 4952.93,1842.15
VM: C2.2 C6.2 C7.2 C8.2 C9.2 CE1.A10 CE1.A11 CE1.A12 CE1.A13 CE1.B10 CE1.B11 CE1.B12 CE1.B13 IC1.2 IC1.11 IC1.12 IC1.21
  other v1: 5080,1620 5120,1620 5160,1620 5200,1620 5240,1620 5280,1620 5320,1620 5360,1620 5400,1620 5060,1650 5100,1650 5140,1650 5180,1650 5220,1650 5260,1650 5300,1650 5340,1650 5380,1650 5420,1650 5060,1795 5100,1795 5060,1835 5100,1835 5060,1870 5100,1870 5038,2104 5014,2124 5062,2124 5008,2352 5041,2352 5073,2352 5073,2391 5073,2425 5070,2470 5110,2470 5150,2470 5190,2470 5230,2470 5040,2500 5260,2500 5020,2530 5060,2530 5240,2530 5280,2530 5000,2560 5040,2560 5080,2560 5220,2560 5260,2560 5300,2560
VREF: IC1.33 R5.1 | length 469
  Top Layer w15: R5.1 4199,2127.5 IC1.33
pads on no net: IC1.29 IC1.30 IC1.31 IC1.32 IC1.35

## Polygon pours and split planes (outlines as drawn)
GND on Bottom Layer "GND_L04_P020" (solid, pour order 20): 4100,1495 4049.95,1547.69 3854.62,1544.1 cw(c3854.62,1698.59) 3700.14,1701.1 3700.02,2745.02 3700.38,2745.02 cw(c3855.05,2745.02) 3857.56,2899.66 3857.56,2900 5300,2900 5700,2900 5746.02,2901.62 cw(c5746.02,2746.95) 5900.66,2744.44 5900.34,1709.39 cw(c5737.54,1709.39) 5734.89,1546.62 5550,1545 5500,1495
VM on Bottom Layer "VM_L04_P005" (solid, pour order 5): 4985,2434 4985,2445 4964,2465 4964,2587 5090,2680 5216,2680 5340,2585 5340,1881.56 5453.5,1738.38 5448.1,1563.31 5425,1526 5425,1302 5421,1296 5379,1296 5375,1302 5374,1515 5366,1526 5332,1526 5324,1515 5324,1307 5317,1297 5282,1297 5275,1306 5275,1515 5265,1526 5236,1526 5225,1515 5224,1308 5212,1296 5184,1296 5175,1304 5175,1515.86 5164,1525 5135,1525 5124,1516 5125,1308 5113,1298 5091,1298 5075,1308 5075,1517 5026.89,1553.97 5026.89,1738.38 4980.64,1784.63
GND on Bottom Layer "GND_L04_P023" (solid, pour order 23): 4975,1311 4981,1304 5016,1304 5025,1311 5025,1510 4975,1510
GND on Bottom Layer "GND_L04_P022" (solid, pour order 22): 4875,1312 4881,1302 4917,1302 4925,1311 4925,1511 4875,1511
GND on Bottom Layer "GND_L04_P021" (solid, pour order 21): 4775,1313 4783,1300 4817,1300 4825,1312 4825,1511 4775,1511
VCC-3V3 on Bottom Layer "VCC-3V3_L04_P000" (solid, pour order 0): 4175,1310 4175,1518.75 4075,1625 4035,1625 4005,1650 4005,1705 4030,1730 4179.51,1730 4223.75,1648.97 4223.75,1310
GND on Top Layer "GND_L01_P016" (solid, pour order 16): 4100,1495 4049.95,1547.69 3854.62,1544.1 cw(c3854.62,1698.59) 3700.14,1701.1 3700.02,2745.02 3700.38,2745.02 cw(c3855.05,2745.02) 3857.56,2899.66 3857.56,2900 5300,2900 5700,2900 5746.02,2901.62 cw(c5746.02,2746.95) 5900.66,2744.44 5900.34,1709.39 cw(c5737.54,1709.39) 5734.89,1546.62 5550.9,1544.1 5500,1495
GND on Top Layer "GND_L01_P019" (solid, pour order 19): 4975,1302 4980,1294 5018,1294 5025,1302 5025,1517 4975,1517
GND on Top Layer "GND_L01_P018" (solid, pour order 18): 4875,1304 4881,1295 4916,1294 4925,1303 4925,1516 4875,1516
GND on Top Layer "GND_L01_P017" (solid, pour order 17): 4775,1304 4786,1296 4813,1295 4825,1304 4825,1513 4775,1513
VM on Top Layer "VM_L01_P002" (solid, pour order 2): 4927,1868 4922,1873 4922,1882 4928.5,1888.5 4987,1888.5 4993.5,1895 5121,1895 5132,1886.75 5132,1778.71 5117,1768 4997,1768 4993.5,1771.5 4993.5,1863 4987,1868
VM on Top Layer "VM_L01_P014" (solid, pour order 14): 5417,1296 5425,1304 5425,1526 5448,1563 5451,1670 5433,1692 5047,1692 5027,1679 5027,1554 5075,1517 5075,1310 5085,1296 5112,1296 5125,1309 5124,1516 5134,1525 5165,1525 5175,1516 5175,1310 5188,1296 5214,1296 5225,1310 5225,1515 5236,1526 5264,1526 5275,1516 5275,1309 5288,1296 5315,1296 5325,1311 5324,1515 5332,1526 5366,1526 5375.51,1512.92 5376.51,1308.99 5387,1295
AOUT1 on Top Layer "AOUT1_L01_P013" (solid, pour order 13): 4992,1903 4977,1918 4927,1918 4922,1923 4922,1982 4927.23,1987.18 4992,1987 4999,1994 5190,1995 5560,2020 5739.33,2020 5795,1978.25 5795,1840 5755,1810 5170.3,1810 5143,1831 5143,1878 5143,1890 5130,1903
AOUT2 on Top Layer "AOUT2_L01_P012" (solid, pour order 12): 4977,1993 4928,1993 4922,1998 4922,2057 4927,2062 5195.71,2062 5210,2082 5210,2135 5244.43,2169.43 5260.57,2169.43 5556.95,2232 5731.23,2232 5795,2187.25 5795,2050 5755,2020 5560,2020 5190,1995
BOUT1 on Top Layer "BOUT1_L01_P011" (solid, pour order 11): 4977,2168 4927,2168 4922,2173 4922,2232 4927.53,2237.26 4992,2237 4996,2243 5174.44,2243 5502,2402 5536,2436 5755.61,2436 5795,2395.3 5795,2270 5749.4,2232 5556.95,2232 5260.57,2169.43
BOUT2 on Top Layer "BOUT2_L01_P009" (solid, pour order 9): 4927,2243 4922,2248 4922,2307 4927,2312 4992,2312 5005.51,2321 5085.48,2321.92 5104,2343 5280.97,2437 5298,2437 5332,2480 5340,2585 5369,2614 5760,2614 5798,2576 5798,2469 5765,2436 5536,2436 5502,2402 5174.44,2243
VM on Top Layer "VM_L01_P008" (solid, pour order 8): 5280.97,2437 5092,2331.7 5092,2437
VM on Top Layer "VM_L01_P007" (solid, pour order 7): 4964,2606.05 5064.19,2680 5244.32,2680 5340,2606.69 5340,2476 5304.8,2432 5099,2432 5085.56,2442 5001,2442 4996,2438 4985,2446 4964,2465
VM on Top Layer "VM_L01_P006" (solid, pour order 6): 4928,2343 4923,2348 4923,2357 4928,2362 4981,2362 4996,2375 4996,2438 5001,2442 5052,2442 5081.3,2442 5085.56,2442 5099,2432 5098.86,2396.57 cw(c5063.83,2393.48) 5099,2393.4 5099,2335.6 cw(c5073.57,2361.94) 5075,2325.36 4999.94,2325.36 cw(c5035.67,2374.86) 4988.81,2335.73 ccw(c4979.4,2332.84) 4983.69,2341.7 4981,2343
VM on Top Layer "VM_L01_P003" (solid, pour order 3): 4922,2132 4928,2138 5127,2138 5131,2134 5131,2096 5127,2092 4928,2092 4922,2098
VCC-3V3 on 3V3 (split plane): 178 vertices, not listed, extent 3720.12,1215.1 5880.67,2881.57
GND on GND (split plane): 178 vertices, not listed, extent 3720.12,1215.1 5880.67,2881.57

## Keep-outs
Keep-Out Layer:
  lines w10: 3700.02,2745.02 3700.14,1701.1 ccw(c3854.62,1698.59) 3854.62,1544.1 4049.95,1547.69 4100,1495 4100,1195 5500,1195 5500,1495 5550,1545 5734.89,1546.62 ccw(c5737.54,1709.39) 5900.34,1709.39 5900.66,2744.44 ccw(c5746.02,2746.95) 5746.02,2901.62 5700,2900 5300,2900 3857.56,2900 ; 3700.38,2745.02 cw(c3855.05,2745.02) 3857.56,2899.66

## Silkscreen, mask and mechanical layers (free items; w line width, h text height)
Top Overlay:
  lines w15: 3975,1760 4025,1760 ; 3975,1910 4025,1910
  lines w20: 3755,1985 4135,1985
  text "Stepper / Driver" at 4073.08,2629 h118.11
  text "B2" at 5341.5,2497.76 h118.11
  text "B1" at 5341.5,2297.76 h118.11
  text "A2" at 5341.5,2087.16 h118.11
  text "I SET" at 3837.24,2005.7 h118.11 r90
  text "SPI" at 4046.59,1887.71 h100
  text "A1" at 5341.5,1887.16 h118.11
  text "H/W" at 4037.72,1732.85 h100
  text "MODE" at 3837.24,1689.52 h118.11 r90
  text "2" at 5585.71,1673.55 h118.11
  text "E" at 5655.46,1620.24 h118.11
  text "A" at 5292.78,1608.46 h118.11
Bottom Overlay:
  text "V2" at 4360.46,2758.22 h100
  text "17-11-2023" at 4831.71,2758.36 h100